# Altium PCB Universal_Driver.PcbDoc (part 1 of 2)
Units mm, origin at the board's own origin, x right, y up, seen from the top; angles counter-clockwise.
Board outline 105.6 x 112.5 mm, 2 copper layers (Top Layer, Bottom Layer); 139 components, 137 nets, 533 pads, 143 vias.
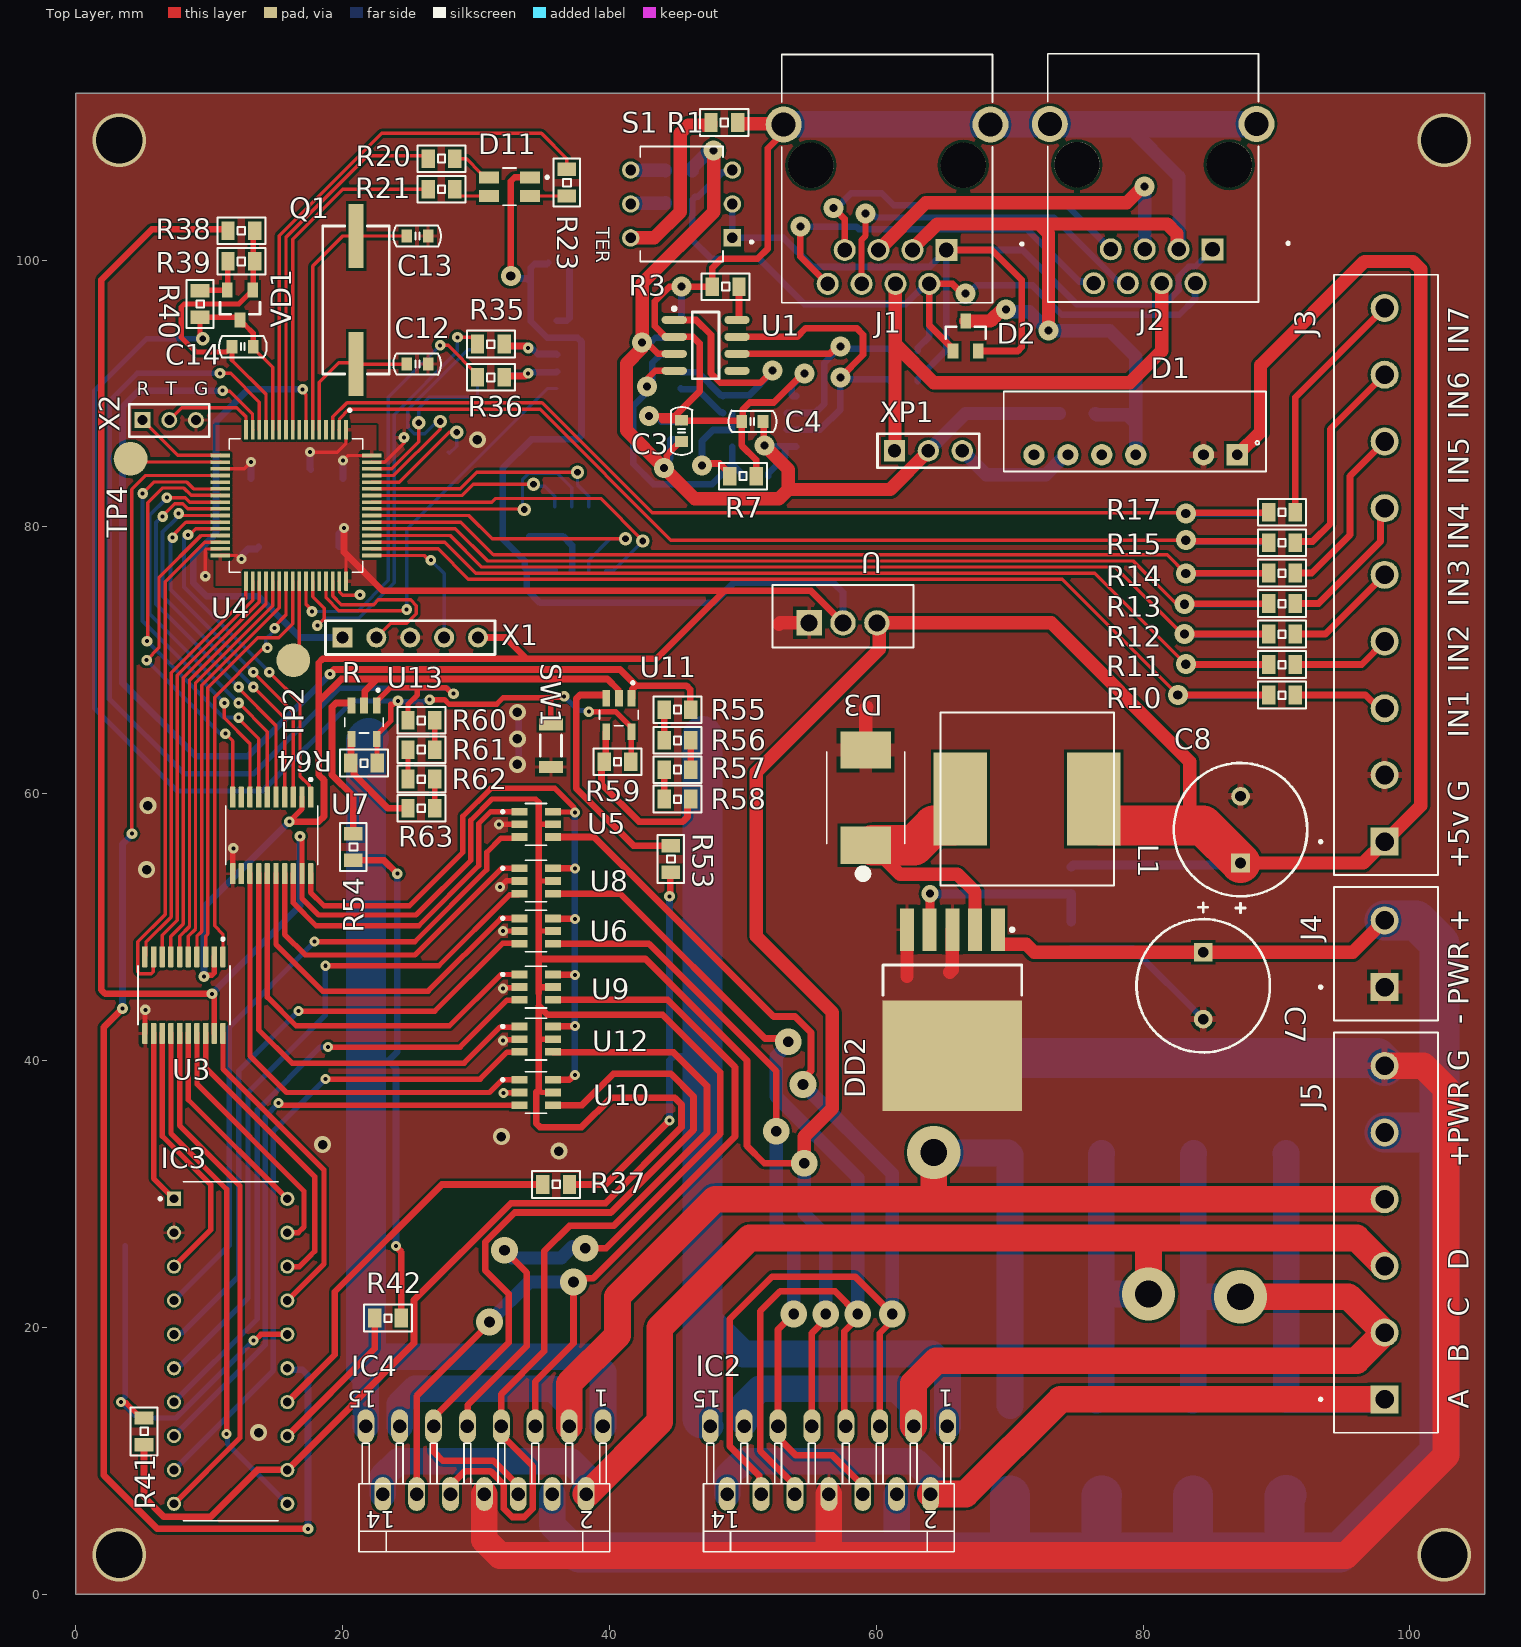
[diagram p0: Top Layer view]
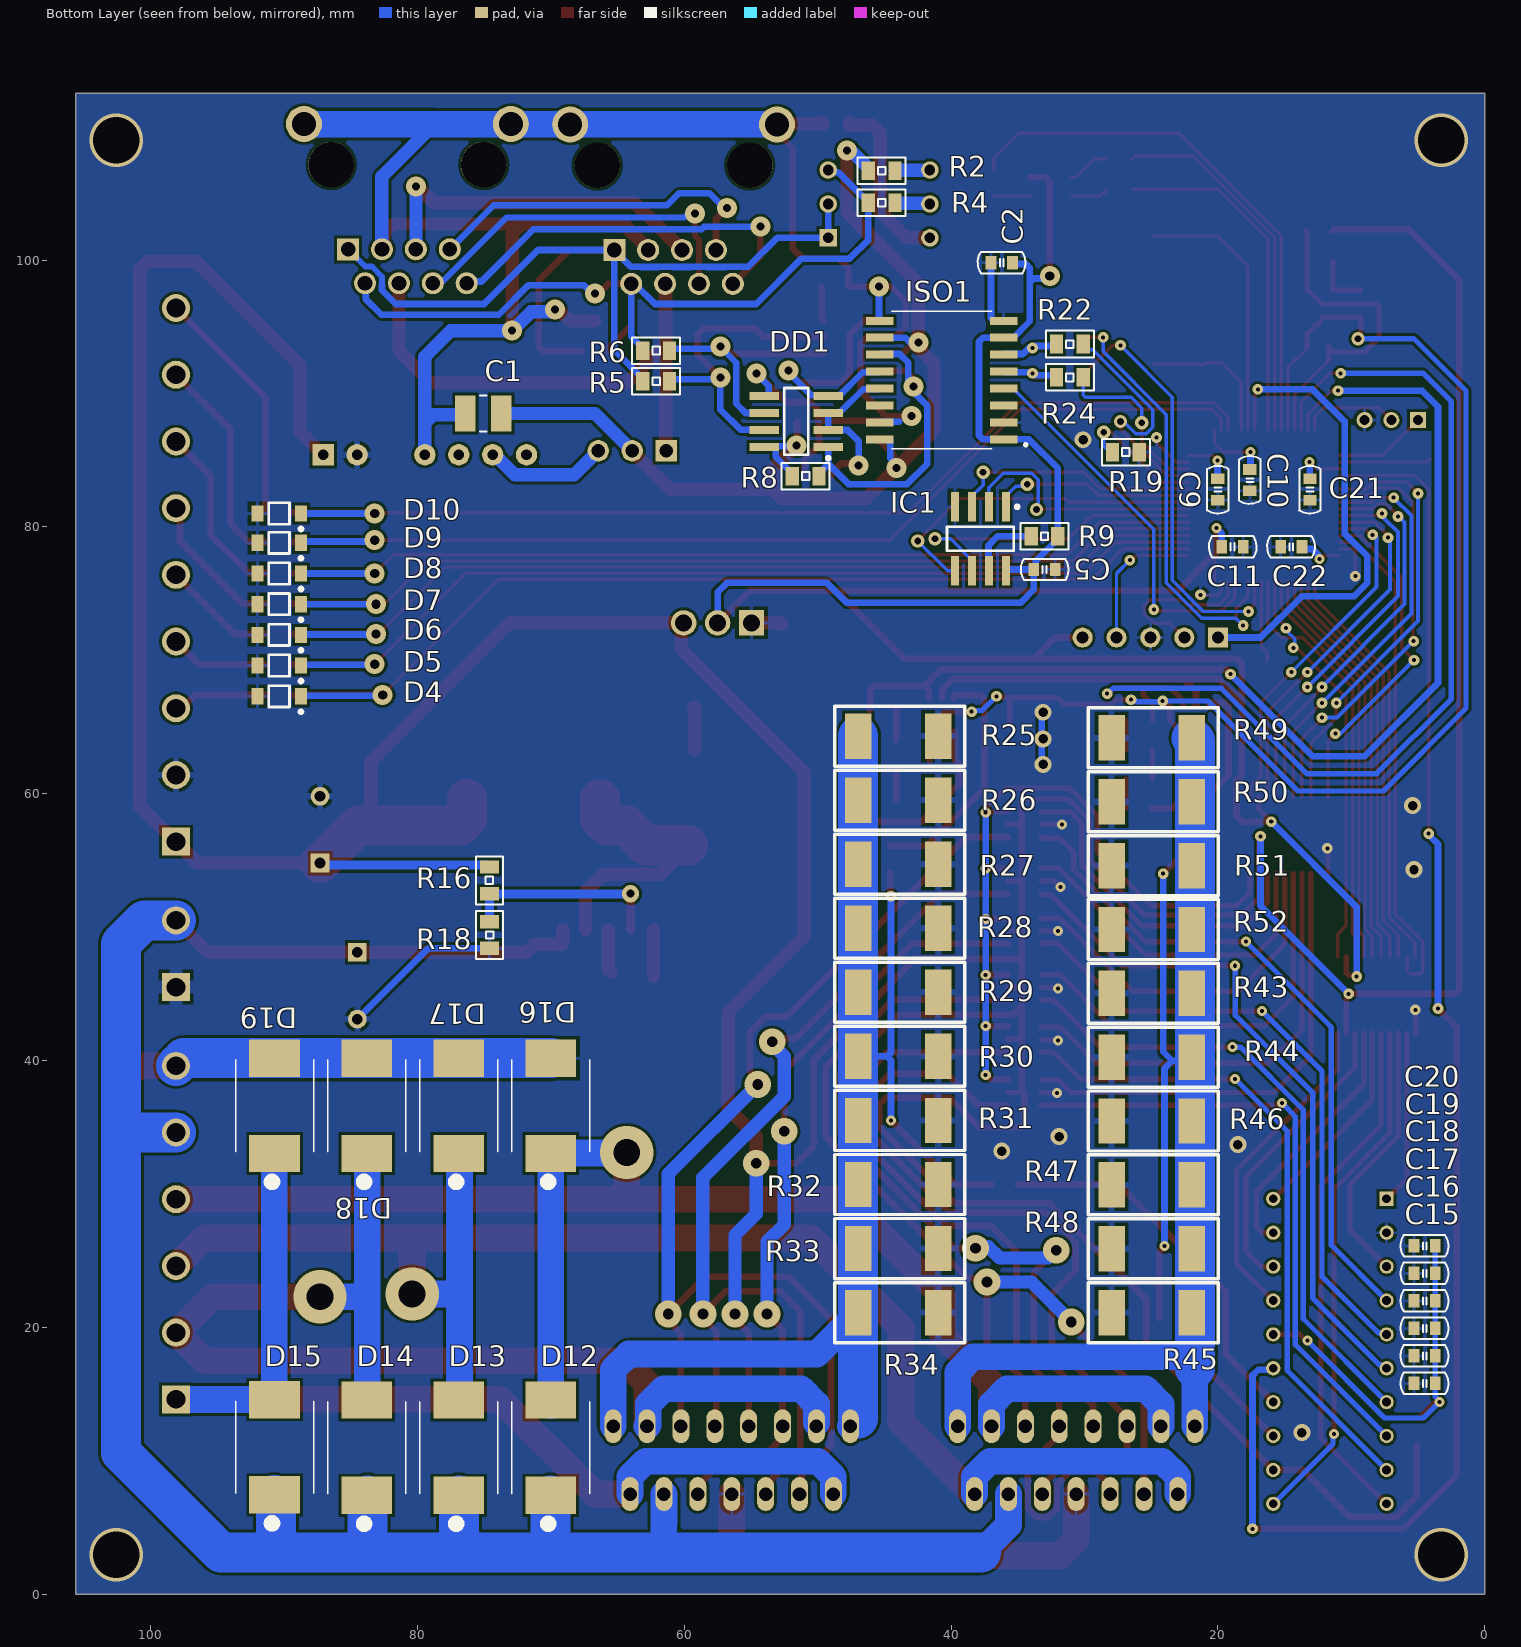
[diagram p1: Bottom Layer view, seen from below]

## Layer stack, top to bottom
Top Solder: solder mask 0.0102, Solder Resist, Dk 3.5
Top Layer: signal copper 0.0356
Dielectric 1: dielectric 0.32, FR-4, Dk 4.8
Bottom Layer: signal copper 0.0356
Bottom Solder: solder mask 0.0102, Solder Resist, Dk 3.5

## Board outline
0,0 0,112.5 105.6,112.5 105.6,0

## Design rules (kind name [scope] priority, off if disabled: settings)
Clearance [All] p1: gap=0.2 ignorepadtopadclearanceinfootprint=FALSE
PolygonConnect [All] p1: connectstyle=Relief reliefconductorwidth=0.254 reliefentries=4 polygonreliefangle="90 Angle" airgapwidth=0.254
RoutingVias [All] p1: holewidth=0.3 width=1 viastyle="Through Hole" minholewidth=0.3 minwidth=0 maxholewidth=1 maxwidth=4
SolderMaskExpansion [All] p1: expansion=0.102 istentingtop=FALSE
UnRoutedNet [All] p1: checkbadconnections=TRUE
Width [All] p1: maxlimit=4 minlimit=0.254 preferedwidth=0.254
29 further rules are at their usual default settings.

## Components (designator, comment, footprint, x,y, rotation, side; value= is the part's Value field where it differs from the comment)
C1 "10uF" CAPC3225X270N 75.059,88.5 r180 bottom
C2 "0.1uF" "CAPACITOR 0603" 35.4,99.8 r0 bottom
C3 "0.1uF" "CAPACITOR 0603" 45.4,88 r270 top
C4 "0.1uF" "CAPACITOR 0603" 49.9,87.9 r0 top
C5 "0.1uF" "CAPACITOR 0603" 33.8,76.8 r180 bottom
C7 "220uF 50v" "ECR 10x13mm" 84.5,45.6 r270 top value=220uF
C8 "220uF 50v" "ECR 10x13mm" 87.3,57.3 r90 top value=220uF
C9 "0.1uF" "CAPACITOR 0603" 20,83.6 r270 bottom
C10 "0.1uF" "CAPACITOR 0603" 17.6,82.7 r90 bottom
C11 "0.1uF" "CAPACITOR 0603" 19.7,78.5 r180 bottom
C12 "20pF" "CAPACITOR 0603" 26.4,92.2 r180 top
C13 "20pF" "CAPACITOR 0603" 26.4,101.8 r180 top
C14 "0.001uF" "CAPACITOR 0603" 11.7,93.5 r0 top
C15 "0.01uF" "CAPACITOR 0603" 3.7,15.8 r0 bottom
C16 "0.01uF" "CAPACITOR 0603" 3.7,17.86 r0 bottom
C17 "0.01uF" "CAPACITOR 0603" 3.7,19.92 r0 bottom
C18 "0.1uF" "CAPACITOR 0603" 3.7,21.98 r0 bottom
C19 "0.1uF" "CAPACITOR 0603" 3.7,24.04 r0 bottom
C20 "0.1uF" "CAPACITOR 0603" 3.7,26.1 r0 bottom
C21 "0.1uF" "CAPACITOR 0603" 13.1,83.6 r270 bottom
C22 "0.1uF" "CAPACITOR 0603" 13.7,78.5 r0 bottom
D1 "AM1DS-0505SJZ" AM2D-NZ 87.06,85.4 r180 top
D2 "SM712" SOT23 66.7,94.3 r90 top
D3 "MBRS540T3G" DIOM7958X213N 59.2,59.7 r90 top
D4 "MMSZ5226BT1G" ONSC-SOD-123-2-425-04_V 90.365,67.3 r0 bottom
D5 "MMSZ5226BT1G" ONSC-SOD-123-2-425-04_V 90.365,69.6 r0 bottom
D6 "MMSZ5226BT1G" ONSC-SOD-123-2-425-04_V 90.365,71.9 r0 bottom
D7 "MMSZ5226BT1G" ONSC-SOD-123-2-425-04_V 90.365,74.2 r0 bottom
D8 "MMSZ5226BT1G" ONSC-SOD-123-2-425-04_V 90.365,76.5 r0 bottom
D9 "MMSZ5226BT1G" ONSC-SOD-123-2-425-04_V 90.365,78.8 r0 bottom
D10 "MMSZ5226BT1G" ONSC-SOD-123-2-425-04_V 90.365,81 r0 bottom
D11 "150141M173100" LED_150141M173100 32.5,105.5 r0 top
D12 "MBRS540T3G" DIOM7958X213N 70,10.975 r90 bottom
D13 "MBRS540T3G" DIOM7958X213N 76.9,10.975 r90 bottom
D14 "MBRS540T3G" DIOM7958X213N 83.8,10.975 r90 bottom
D15 "MBRS540T3G" DIOM7958X213N 90.7,11.007 r90 bottom
D16 "MBRS540T3G" DIOM7958X213N 70,36.6 r90 bottom
D17 "MBRS540T3G" DIOM7958X213N 76.9,36.6 r90 bottom
D18 "MBRS540T3G" DIOM7958X213N 83.8,36.6 r90 bottom
D19 "MBRS540T3G" DIOM7958X213N 90.7,36.6 r90 bottom
DD1 "MAX485" NSO8 51.6,87.9 r0 bottom
DD2 "LM2596S-ADJ" TO-263 65.7,43.8 r270 top
IC1 "GD25Q16CTIGR" NSO8 37.8,79.1 r270 bottom
IC2 "" MW-15 56.44,7.5 r180 top
IC3 "L297" DIP850W45P254L2540H393Q20 11.6,18.2 r0 top
IC4 "" MW-15 30.62,7.5 r180 top
ISO1 "D?" *SOIC127P1030X265-16N 40.7,91 r0 bottom
J1 "A-2004-2-4-LPS-N-R" ASSMANN_A-2004-2-4-LPS-N-R 60.8,107.1 r180 top
J2 "A-2004-2-4-LPS-N-R" ASSMANN_A-2004-2-4-LPS-N-R 80.75,107.15 r180 top
J3 "TB003-500-P09BE" *CUI_TB003-500-P09BE 98.1,56.4 r90 top
J4 "TB003-500-P02BE" CUI_TB003-500-P02BE 98.1,45.5 r90 top
J5 "TB003-500-P06BE" CUI_TB003-500-P06BE 98.1,14.6 r90 top
L1 "33uH" SRR1208 71.3,59.6 r0 top
Q1 "12MHz" HC49SM 21,97 r270 top
R1 "560" "Resistor 0805" 47.6,110.3 r0 top
R2 "560" "Resistor 0805" 44.2,106.7 r0 bottom
R3 "10K" "Resistor 0805" 47.7,98 r0 top
R4 "120" "Resistor 0805" 44.2,104.3 r0 bottom
R5 "10" "Resistor 0805" 63.1,90.9 r180 bottom
R6 "10" "Resistor 0805" 63.1,93.2 r180 bottom
R7 "10K" "Resistor 0805" 49,83.8 r0 top
R8 "10K" "Resistor 0805" 51.9,83.8 r180 bottom
R9 "10K" "Resistor 0805" 32,79.3 r0 bottom
R10 "20" "Resistor 0805" 91.4,67.4 r180 top
R11 "20" "Resistor 0805" 91.4,69.683 r180 top
R12 "20" "Resistor 0805" 91.4,71.967 r180 top
R13 "20" "Resistor 0805" 91.4,74.25 r180 top
R14 "20" "Resistor 0805" 91.4,76.533 r180 top
R15 "20" "Resistor 0805" 91.4,78.817 r180 top
R16 "3K" "Resistor 0805" 74.6,52.5 r90 bottom
R17 "20" "Resistor 0805" 91.4,81.1 r180 top
R18 "1K" "Resistor 0805" 74.6,50.4 r270 bottom
R19 "510" "Resistor 0805" 27.9,85.6 r180 bottom
R20 "4.7k" "Resistor 0805" 26.4,107.6 r0 top
R21 "4.7k" "Resistor 0805" 26.4,105.3 r0 top
R22 "0" "Resistor 0805" 30.1,93.7 r0 bottom
R23 "4.7k" "Resistor 0805" 36.8,106.8 r270 top
R24 "0" "Resistor 0805" 30.1,91.2 r0 bottom
R25 "1R" R2512 43.964,64.314 r180 bottom
R26 "1R" R2512 43.964,59.512 r180 bottom
R27 "1R" R2512 43.964,54.711 r180 bottom
R28 "1R" R2512 43.964,49.909 r180 bottom
R29 "1R" R2512 43.964,45.108 r180 bottom
R30 "1R" R2512 43.964,40.306 r180 bottom
R31 "1R" R2512 43.964,35.505 r180 bottom
R32 "1R" R2512 43.964,30.703 r180 bottom
R33 "1R" R2512 43.964,25.902 r180 bottom
R34 "1R" R2512 43.964,21.1 r180 bottom
R35 "0" "Resistor 0805" 32.1,93.7 r180 top
R36 "0" "Resistor 0805" 32.1,91.2 r180 top
R37 "1K" "Resistor 0805" 35,30.7 r0 top
R38 "20" "Resistor 0805" 13.4,102.2 r180 top
R39 "620" "Resistor 0805" 13.4,99.9 r180 top
R40 "3.1k" "Resistor 0805" 9.3,97.7 r270 top
R41 "22K" "Resistor 0805" 5.1,13.2 r270 top
R42 "1K" "Resistor 0805" 24.4,20.7 r180 top
R43 "1R" R2512 24.964,45.034 r180 bottom
R44 "1R" R2512 24.964,40.248 r180 bottom
R45 "1R" R2512 24.964,21.1 r180 bottom
R46 "1R" R2512 24.964,35.461 r180 bottom locked
R47 "1R" R2512 24.964,30.674 r180 bottom
R48 "1R" R2512 24.964,25.887 r180 bottom
R49 "1R" R2512 24.964,64.182 r180 bottom
R50 "1R" R2512 24.964,59.395 r180 bottom
R51 "1R" R2512 24.964,54.608 r180 bottom
R52 "1R" R2512 24.964,49.821 r180 bottom
R53 "1K" "Resistor 0805" 44.6,56.1 r270 top
R54 "1K" "Resistor 0805" 20.8,57 r270 top
R55 "10K" "Resistor 0805" 44.1,66.3 r0 top
R56 "10K" "Resistor 0805" 46.1,64 r180 top
R57 "10K" "Resistor 0805" 44.1,61.8 r0 top
R58 "10K" "Resistor 0805" 46.1,59.6 r180 top
R59 "10K" "Resistor 0805" 41.6,62.4 r180 top
R60 "10K" "Resistor 0805" 26.9,65.5 r180 top
R61 "10K" "Resistor 0805" 24.9,63.3 r0 top
R62 "10K" "Resistor 0805" 26.9,61.1 r180 top
R63 "10K" "Resistor 0805" 24.9,58.9 r0 top
R64 "10K" "Resistor 0805" 22.6,62.3 r180 top
S1 "DS04-254-1L-03BK" SW_DS04-254-1L-03BK 45.4,104.2 r180 top
SW1 "" "R - 1206" 35.6,63.6 r90 top
TP2 "" TestPoint_SMD 16.3,70 r0 top
TP4 "" TestPoint_SMD 4.1,85.1 r0 top
U "LM1117T-3.3" TO254P470X1016X2222-3P 60.04,73.816 r0 top
U1 "MCP2551-I/SN" SOIC-SN8_L 47.2,93.6 r0 top
U3 "TXS0108EPWR" SOP65P640X120-20N 8.1,44.9 r270 top
U4 "STM32F303RET6" QFP50P1200X1200X160-64N 16.5,81.6 r270 top
U5 "TS5A3160DBVR" *SOT95P280X145-6N 34.5,57.7 r0 top
U6 "TS5A3160DBVR" *SOT95P280X145-6N 34.5,49.7 r0 top
U7 "TXS0108EPWR" SOP65P640X120-20N 14.675,56.87 r270 top
U8 "TS5A3160DBVR" *SOT95P280X145-6N 34.5,53.45 r0 top
U9 "TS5A3160DBVR" *SOT95P280X145-6N 34.5,45.5 r0 top
U10 "TS5A3160DBVR" *SOT95P280X145-6N 34.5,37.6 r0 top
U11 "LMC7101BIM5" *SOT95P280X145-5N 40.7,65.9 r270 top
U12 "TS5A3160DBVR" *SOT95P280X145-6N 34.5,41.6 r0 top
U13 "LMC7101BIM5" *SOT95P280X145-5N 21.6,65.345 r270 top
VD1 "TL431" SOT23 12.307,96.624 r270 top
X1 "PLS-5" PLS-5-3D 19.98,71.7 r0 top
X2 "PLS2-3" PLS-3-2 5,88 r270 top
XP1 "PLS-3" ZL201-3 63.9,85.7 r0 top

## Footprints (in the part's own frame and the unit in brackets; to place one, negate y for a bottom-side part, rotate by r counter-clockwise, add the part's x,y. Pads: shape width x height; smd on the part's side, far side on the other; paste and mask are expansions set on the pad)
*CUI_TB003-500-P09BE [mm]
  rect 2.1x2.1 hole 1.4: 1(0,0)
  round 2.1 hole 1.4: 2(5,0) 3(10,0) 4(15,0) 5(20,0) 6(25,0) 7(30,0) 8(35,0) 9(40,0)
  silkscreen extent -2.5,-4 42.5,4.9
*SOIC127P1030X265-16N [mm]
  rect 2.06x0.6 smd: 1(-4.64,4.445) 2(-4.64,3.175) 3(-4.64,1.905) 4(-4.64,0.635) 5(-4.64,-0.635) 6(-4.64,-1.905) 7(-4.64,-3.175) 8(-4.64,-4.445) 9(4.64,-4.445) 10(4.64,-3.175) 11(4.64,-1.905) 12(4.64,-0.635) 13(4.64,0.635) 14(4.64,1.905) 15(4.64,3.175) 16(4.64,4.445)
  silkscreen extent -6.4,-5.15 3.75,5.15
*SOT95P280X145-5N [mm]
  rect 1.21x0.59 smd: 1(-1.255,0.95) 2(-1.255,0) 3(-1.255,-0.95) 4(1.255,-0.95) 5(1.255,0.95)
  silkscreen extent -2.51,-1.45 0.8,1.45, body extent -1.18,-1.45 1.2,1.45, height 1.1
*SOT95P280X145-6N [mm]
  rect 1.21x0.58 smd: 1(-1.255,0.95) 2(-1.255,0) 3(-1.255,-0.95) 4(1.255,-0.95) 5(1.255,0) 6(1.255,0.95)
  silkscreen extent -2.6,-1.56 0.8,1.56
AM2D-NZ [mm]
  rect 1.6x1.6 hole 0.8: 1(0,0)
  round 1.6 hole 0.8: 2(2.54,0) 4(7.62,0) 5(10.16,0) 6(12.7,0) 7(15.24,0)
  silkscreen extent -2.15,-4.75 17.5,1.25
ASSMANN_A-2004-2-4-LPS-N-R [mm]
  rect 1.65x1.65 hole 1.1: 1(-4.445,6.35)
  round 1.65 hole 1.1: 2(-3.175,8.89) 3(-1.905,6.35) 4(-0.635,8.89) 5(0.635,6.35) 6(1.905,8.89) 7(3.175,6.35) 8(4.445,8.89)
  round 2.7 hole 1.8: S1(-7.75,-3.05) S2(7.75,-3.05)
  round 3.4 hole 3.4 unplated: ""(-5.715,0) ""(5.715,0)
  silkscreen extent -10.21,-8.3 7.9,10.3
"CAPACITOR 0603" [mm]
  rect 0.8x1 smd: 1(0,0) 2(1.6,0)
  silkscreen extent -0.97,-0.8 2.6,0.8, body extent -0.01,-0.38 1.64,0.42, height 0.81
CAPC3225X270N [mm]
  rect 1.53x2.72 smd: 1(-1.341,0) 2(1.341,0)
  silkscreen extent -0.26,-1.35 0.26,1.35
CUI_TB003-500-P02BE [mm]
  rect 2.1x2.1 hole 1.4: 1(0,0)
  round 2.1 hole 1.4: 2(5,0)
  silkscreen extent -2.5,-4 7.5,4.9
CUI_TB003-500-P06BE [mm]
  rect 2.1x2.1 hole 1.4: 1(0,0)
  round 2.1 hole 1.4: 2(5,0) 3(10,0) 4(15,0) 5(20,0) 6(25,0)
  silkscreen extent -2.5,-4 27.5,4.9
DIOM7958X213N [mil]
  rect 110x150 smd: A(140.49,0) C(-140.49,0)
  silkscreen extent -237,-115 135,115
DIP850W45P254L2540H393Q20 [mm]
  rect 1.06x1.06 hole 0.66: 1(-4.25,11.43)
  round 1.06 hole 0.66: 2(-4.25,8.89) 3(-4.25,6.35) 4(-4.25,3.81) 5(-4.25,1.27) 6(-4.25,-1.27) 7(-4.25,-3.81) 8(-4.25,-6.35) 9(-4.25,-8.89) 10(-4.25,-11.43) 11(4.25,-11.43) 12(4.25,-8.89) 13(4.25,-6.35) 14(4.25,-3.81) 15(4.25,-1.27) 16(4.25,1.27) 17(4.25,3.81) 18(4.25,6.35) 19(4.25,8.89) 20(4.25,11.43)
  silkscreen extent -5.38,-12.7 3.55,12.7
"ECR 10x13mm" [mm] "Rad Capacitor 50В-220мкФ"
  rect 1.4x1.4 hole 0.8 mask+0.06: 1(-2.5,0)
  round 1.4 hole 0.8 mask+0.06: 2(2.5,0)
  silkscreen extent -6.22,-5 5,5, body extent -5,-5 4.97,5, height 12.51
HC49SM [mm] "Quartz crystal resonator"
  rect 4.8x1.1 smd mask+0.06: 1(-4.8,0) 2(4.8,0)
  silkscreen extent -5.55,-2.5 5.55,2.5, body extent -6.7,-2.45 6.7,2.45, height 5.09
LED_150141M173100 [mm]
  rect 1.5x0.9 smd: 1(1.55,0.7) 2(1.55,-0.7) 3(-1.55,0.7) 4(-1.55,-0.7)
  silkscreen extent -0.5,-1.4 2.93,1.4
MW-15 [mil]
  oval 50x100 hole 40: 1(-350,-200) 2(-300,0) 3(-250,-200) 4(-200,0) 5(-150,-200) 6(-100,0) 7(-50,-200) 8(0,0) 9(50,-200) 10(100,0) 11(150,-200) 12(200,0) 13(250,-200) 14(300,0) 15(350,-200)
  silkscreen extent -370,-150 370,170
NSO8 [mm] "SOIC, 8-Leads, Body 4.9x3.9mm, Pitch 1.27mm"
  rect 2.2x0.6 smd mask+0.06: 1(-2.4,1.905) 2(-2.4,0.635) 3(-2.4,-0.635) 4(-2.4,-1.905) 5(2.4,-1.905) 6(2.4,-0.635) 7(2.4,0.635) 8(2.4,1.905)
  silkscreen extent -2.52,-2.5 0.9,2.88, body extent -3,-2.45 3,2.45, height 1.7
ONSC-SOD-123-2-425-04_V [mm] "SOD, 2-Leads, Body 2.69x1.6mm"
  rect 0.91x1.22 smd: 1(-1.635,0) 2(1.635,0)
  silkscreen extent -1.76,-0.8 0.78,1.28, body extent -1.35,-0.8 1.35,0.8, height 1.35
PLS-3-2 [mm] "Connector; Header; 1x3 Position"
  rect 1.2x1.2 hole 0.75: 1(0,0)
  round 1.2 hole 0.75: 2(0,2) 3(0,4)
  silkscreen extent -1.2,-1 1.25,5, body extent -1.2,-1 1.2,5, height 5.5
PLS-5-3D [mm] "Connector; Header; 5 Position"
  rect 1.5x1.5 hole 0.9: 1(0,0)
  round 1.5 hole 0.9: 2(2.54,0) 3(5.08,0) 4(7.62,0) 5(10.16,0)
  silkscreen extent -1.27,-1.27 11.43,1.27, body extent -1.27,-1.27 11.43,1.27, height 8.44
QFP50P1200X1200X160-64N [mm]
  rrect25% 1.47x0.28 smd: 1(-5.67,3.75) 2(-5.67,3.25) 3(-5.67,2.75) 4(-5.67,2.25) 5(-5.67,1.75) 6(-5.67,1.25) 7(-5.67,0.75) 8(-5.67,0.25) 9(-5.67,-0.25) 10(-5.67,-0.75) 11(-5.67,-1.25) 12(-5.67,-1.75) 13(-5.67,-2.25) 14(-5.67,-2.75) 15(-5.67,-3.25) 16(-5.67,-3.75) 33(5.67,-3.75) 34(5.67,-3.25) 35(5.67,-2.75) 36(5.67,-2.25) 37(5.67,-1.75) 38(5.67,-1.25) 39(5.67,-0.75) 40(5.67,-0.25) 41(5.67,0.25) 42(5.67,0.75) 43(5.67,1.25) 44(5.67,1.75) 45(5.67,2.25) 46(5.67,2.75) 47(5.67,3.25) 48(5.67,3.75)
  rrect25% 0.28x1.47 smd: 17(-3.75,-5.67) 18(-3.25,-5.67) 19(-2.75,-5.67) 20(-2.25,-5.67) 21(-1.75,-5.67) 22(-1.25,-5.67) 23(-0.75,-5.67) 24(-0.25,-5.67) 25(0.25,-5.67) 26(0.75,-5.67) 27(1.25,-5.67) 28(1.75,-5.67) 29(2.25,-5.67) 30(2.75,-5.67) 31(3.25,-5.67) 32(3.75,-5.67) 49(3.75,5.67) 50(3.25,5.67) 51(2.75,5.67) 52(2.25,5.67) 53(1.75,5.67) 54(1.25,5.67) 55(0.75,5.67) 56(0.25,5.67) 57(-0.25,5.67) 58(-0.75,5.67) 59(-1.25,5.67) 60(-1.75,5.67) 61(-2.25,5.67) 62(-2.75,5.67) 63(-3.25,5.67) 64(-3.75,5.67)
  silkscreen extent -7.24,-5 5,5, body extent -6,-6 6,6, height 1.59
R2512 [mm]
  rect 2x3.4 smd: 1(-3,0) 2(3,0)
  silkscreen extent -4.75,-2.25 5,2.25, body extent -3.2,-1.6 3.2,1.6, height 0.6
"R - 1206" [mm] "Резистор 1206"
  rect 0.9x1.8 smd: 1(-1.6,0) 2(1.6,0)
  silkscreen extent -0.8,-0.8 0.8,0.8, body extent -1.6,-0.8 1.6,0.8, height 0.6
"Resistor 0805" [mm]
  rect 1x1.4 smd: 1(0,0) 2(2,0)
  silkscreen extent -0.8,-1 2.8,1, body extent -0.03,-0.65 2.02,0.65, height 0.41
SOIC-SN8_L [mm] "SOIC, 8-Leads, Body 4.9x3.8mm, Pitch 1.27mm, IPC High Density"
  oval 1.9x0.6 smd: 1(-2.35,1.905) 2(-2.35,0.635) 3(-2.35,-0.635) 4(-2.35,-1.905) 5(2.35,-1.905) 6(2.35,-0.635) 7(2.35,0.635) 8(2.35,1.905)
  silkscreen extent -2.47,-2.5 1,2.88, body extent -2,-2.5 2,2.5, height 1.75
SOP65P640X120-20N [mm]
  rrect25% 1.57x0.41 smd: 1(-2.87,2.925) 2(-2.87,2.275) 3(-2.87,1.625) 4(-2.87,0.975) 5(-2.87,0.325) 6(-2.87,-0.325) 7(-2.87,-0.975) 8(-2.87,-1.625) 9(-2.87,-2.275) 10(-2.87,-2.925) 11(2.87,-2.925) 12(2.87,-2.275) 13(2.87,-1.625) 14(2.87,-0.975) 15(2.87,-0.325) 16(2.87,0.325) 17(2.87,0.975) 18(2.87,1.625) 19(2.87,2.275) 20(2.87,2.925)
  silkscreen extent -4.29,-3.45 2.2,3.45, body extent -3.16,-3.25 3.24,3.25, height 1.2
SOT23 [mm] "SOT23, 3-Leads, Body 2.9x1.3mm, Pitch 0.95mm"
  rect 1.1x0.8 smd mask+0.06: 1(-1.125,0.95) 2(-1.125,-0.95) 3(1.125,0)
  silkscreen extent -0.2,-1.5 0.7,1.5, body extent -1.32,-1.5 1.32,1.5, height 1.08
SRR1208 [mm]
  rect 4x7 smd: 1(-5,0) 2(5,0)
  silkscreen extent -6.5,-6.5 6.5,6.5
SW_DS04-254-1L-03BK [mm]
  rect 1.308x1.308 hole 0.8: 1A(-3.81,2.54)
  round 1.308 hole 0.8: 1B(3.81,2.54) 2A(-3.81,0) 2B(3.81,0) 3A(-3.81,-2.54) 3B(3.81,-2.54)
  silkscreen extent -5.35,-4.31 3.1,4.31
TestPoint_SMD [mm]
  round 2.524 smd: 1(0,0)
TO254P470X1016X2222-3P [mil]
  rect 75x75 hole 50: 1(-200,-40)
  round 75 hole 50: 2(-100,-40) 3(0,-40)
  silkscreen extent -308,-112 108,72
TO-263 [mm] "D2-PAK, 6-Leads, Body 8.6x10.2mm, Pitch 1.7mm, Lead Span 14.1mm"
  rect 3.2x1.05 smd mask+0.06: 1(-6,3.4) 2(-6,1.7) 3(-6,0) 4(-6,-1.7) 5(-6,-3.4)
  rect 8.3x10.45 smd mask+0.06: 6(3.45,0)
  silkscreen extent -6.12,-5.2 -1.1,5.2, body extent -7.18,-5.08 7.46,5.08, height 4.57
ZL201-3 [mm] "Connector; PLS-3; pitch 2.54"
  rect 1.6x1.6 hole 1 mask+0.06: 1(-2.54,0)
  round 1.6 hole 1 mask+0.06: 2(0,0) 3(2.54,0)
  silkscreen extent -3.81,-1.27 3.81,1.27, body extent -3.81,-1.27 3.81,1.27, height 8.44

## Part data
C1 C2 C3 C4 C5 C9 C10 C11 C12 C13 C14 C15 C16 C17 C18 C19 C20 C21 C22: library part Capasitor
C7 C8: library part "Cap Pol", "Polarized Capacitor (Rad)", Voltage=50, Type=Type, URL=http://www.hitano.com.tw/PDF/ECR_081225.pdf
D2: "Asymmetrical TVS Diode for Extended Common-Mode RS-485"
D3 D12 D13 D14 D15 D16 D17 D18 D19: "Diode Schottky 40V 5A Surface Mount SMC", Package="DO-214 ON Semiconductor", Availability=Unavailable, MF="ON Semiconductor", MP=MBRS540T3G, Price=None, SnapEDA_Link=https://www.snapeda.com/parts/MBRS540T3G/ON%20Semiconductor/view-part/78777/?ref=snap
D4 D5 D6 D7 D8 D9 D10: "Zener Voltage Regulator, 500 mW, 2-Pin SOD-123, Pb-Free, Tape and Reel", Manufacturer="On Semiconductor", Supplier Part Number 1=MMSZ5226BT1GOSTR-ND, ComponentLink1Description="Manufacturer URL", ComponentLink1URL=http://www.onsemi.com/, ComponentLink2Description=Datasheet, ComponentLink2URL=http://www.onsemi.com/pub_link/Collateral/MMSZ5221BT1-D.PDF, ComponentLink3Description="Package Specification", ComponentLink3URL=http://www.onsemi.com/pub_link/Collateral/425-04.PDF, DatasheetVersion="Rev. 12", Mounting Technology="Surface Mount", P Max (W)=0.5, PackageDescription="2-Pin SOD, Body 1.6 x 2.69 mm", PackageReference=SOD-123-2-425-04, PackageVersion="Rev. G, 10/2009", Packing="Tape and Reel", PartNumber=MMSZ5226BT1G, RoHS=Pb-Free, Supplier 1=Digi-Key, Supplier 2=Digi-Key, Supplier 3=Digi-Key, Supplier 4=Farnell, Supplier 5=Farnell, Supplier 6=Farnell, Supplier 7=Newark, Supplier 8=Newark, Supplier 9=Mouser, Supplier Part Number 2=MMSZ5226BT1GOSCT-ND, Supplier Part Number 3=MMSZ5226BT1GOSDKR-ND, Supplier Part Number 4=1431269, Supplier Part Number 5=1431269RL, Supplier Part Number 6=2370825, Supplier Part Number 7=67R1367, Supplier Part Number 8=45J1591, Supplier Part Number 9=863-MMSZ5226BT1G, VZ Typ (V)=3.3
D11: "Red, Green, Blue _RGB_ 625nm Red, 520nm Green, 470nm Blue LED Indication - Discrete 2V Red, 3.2V Green, 3.2V Blue 1411 _3528 Metric_", Package="1411 WÃ¼rth Elektronik", Availability=Unavailable, MF="Wurth Electronics", MP=150141M173100, Price=None, SnapEDA_Link=https://www.snapeda.com/parts/150141M173100/Wurth%20Electronics%20Inc./view-part/281733/?ref=snap
DD1: "Low-Power, Slew-Rate-Limited RS-485/RS-422 Transceiver", ComponentLink1URL=http://pdfserv.maxim-ic.com/en/ds/MAX1487-MAX491.pdf, Type=MAX485
DD2: "SIMPLE SWITCHER® Power Converter 150 KHz 3A Step-Down Voltage Regulator, 5-pin TO-263", Manufacturer="National Semiconductor", ComponentLink1URL=http://www.national.com/ds/LM/LM2596.pdf, ComponentLink2URL=http://www.national.com/pf/LM/LM2596.html, ComponentLink3URL=http://www.national.com/packaging/folders/ts5b.html, CompType=Switcher, PartNumber=LM2596S-ADJ, Published=13.04.2012, Publisher="Reukov A.V."
IC1: library part W25Q128FVEIG, "128M-bit Serial Flash Memory with uniform 4KB sectors and Dual/Quad SPI and QPI"
IC2 IC4: library part L298N, "Dual Full-Bridge Driver"
IC3: "Stepper Motor Controller"
ISO1: library part ISO7341
J1 J2: "Jack Modular Connector 8p8c _RJ45, Ethernet_ 90Â° Angle _Right_ Shielded", Package=None, Availability=Unavailable, MF="Assmann WSW", MP=A-2004-2-4-LPS-N-R, Price=None, SnapEDA_Link=https://www.snapeda.com/parts/A-2004-2-4-LPS-N-R/Assmann%20WSW%20Components/view-part/454861/?ref=snap
J3: "2~24 Poles, Screw Type, Horizontal, 5.0 Pitch, 26~14 (AWG), Terminal Block Connector", Package=None, Availability=Warning, Check_prices=https://www.snapeda.com/parts/TB003-500-P09BE/CUI%20Devices/view-part/3590672/?ref=eda, CUI_purchase_URL=https://www.cuidevices.com/product/interconnect/connectors/terminal-blocks/tb003-500-series?utm_source=snapeda.com&utm_medium=referral&utm_campaign=snapedaBOM, DigiKey-Purchase-URL=https://snapeda.com/shop?store=DigiKey&id=3590672, MF="CUI Devices", Mouser-Purchase-URL=https://snapeda.com/shop?store=Mouser&id=3590672, MP=TB003-500-P09BE, Price=None, SnapEDA_Link=https://www.snapeda.com/parts/TB003-500-P09BE/CUI%20Devices/view-part/3590672/?ref=snap
J4 J5: "2~24 Poles, Screw Type, Horizontal, 5.0 Pitch, 26~14 _AWG_, Terminal Block Connector", Package=None, Availability=Unavailable, MF="CUI Devices", Price=None
  J4: MP=TB003-500-P02BE, SnapEDA_Link=https://www.snapeda.com/parts/TB003-500-P02BE/CUI%20Devices/view-part/3590637/?ref=snap
  J5: MP=TB003-500-P06BE, SnapEDA_Link=https://www.snapeda.com/parts/TB003-500-P06BE/CUI%20Devices/view-part/3590657/?ref=snap
L1: library part "Inductor With Magnetic core", "Inductor With Core"
Q1: library part "Quartz Crystal", "Quartz Crystal"
R1 R2 R3 R4 R5 R6 R7 R8 R9 R10 R11 R12 R13 R14 R15 R16 R17 R18 R19 R20 R21 R22 R23 R24 R35 R36 R37 R38 R39 R40 R41 R42 R53 R54 R55 R56 R57 R58 R59 R60 R61 R62 R63 R64: library part Resistor
R25 R26 R27 R28 R29 R30 R31 R32 R33 R34 R43 R44 R45 R46 R47 R48 R49 R50 R51 R52: library part "Resistor - 1%", "Resistor - 1%"
S1: "3 Pole, Raised Actuator, Flat Bottom, Long Pin, DIP Switch", Package=None, Availability=Unavailable, MF="CUI Devices", MP=DS04-254-1L-03BK, Price=None, SnapEDA_Link=https://www.snapeda.com/parts/DS04-254-1L-03BK/CUI%20Devices/view-part/4467361/?ref=snap
SW1: library part "SMD Solder Jumper", "2 SMD Pads for Bound by Solder  Drop"
TP2 TP4: library part "Test Point", "Test Point"
U: "Linear Voltage Regulator IC 1 Output 800mA TO-220-3", Package="TO-220 Texas Instruments", Availability=Unavailable, MF="Texas Instruments", MP=LM1117T-3.3, Price=None, SnapEDA_Link=https://www.snapeda.com/parts/LM1117T-3.3/Texas%20Instruments/view-part/103788/?ref=snap
U1: "High-Speed CAN Transceiver, 8-Pin SOIC, Industrial Temperature", Supplier Part Number 1=MCP2551-I/SN-ND, Code_IPC=SOIC127P600-8, Code_JEDEC=MS-012, ComponentLink1Description=Datasheet, ComponentLink1URL=http://ww1.microchip.com/downloads/en/DeviceDoc/21667E.pdf, ComponentLink2Description="Packaging Specification", ComponentLink2URL=http://www.microchip.com/stellent/groups/techpub_sg/documents/packagingspec/en012702.pdf, ComponentLink3Description="Microchip.com Home", ComponentLink3URL=http://www.microchip.com/, DatasheetVersion="revE, Jan-2007", PackageDescription="8-Lead Plastic Small Outline (SN) - Narrow, 3.90mm Body [SOIC]", PackageReference=SOIC-SN8, PackageVersion="revBB, Aug-2009", Published=29-Jan-2009, Publisher="Altium Limited", Supplier 1=Digi-Key, Supplier 2=Farnell, Supplier Part Number 2=9758569
U3 U7: "8-Bit Bidirectional Voltage-Level Shifter For Open-Drain And Push-Pull Application", Package="TSSOP-20 Texas Instruments", Availability=Unavailable, DigiKey-Purchase-URL=https://snapeda.com/shop?store=DigiKey&id=105750, MF="Texas Instruments", Mouser-Purchase-URL=https://snapeda.com/shop?store=Mouser&id=105750, MP=TXS0108EPWR, Price=None, SnapEDA_Link=https://www.snapeda.com/parts/TXS0108EPWR/Texas%20Instruments/view-part/105750/?ref=snap, Texas_Instruments-Purchase-URL=https://snapeda.com/shop?store=Texas+Instruments&id=105750
U4: "ARMÂ® CortexÂ®-M4 STM32F3 Microcontroller IC 32-Bit 72MHz 512KB _512K x 8_ FLASH 64-LQFP _10x10_", Package="LQFP-64 STMicroelectronics", Availability=Unavailable, MF=STMicroelectronics, MP=STM32F303RET6, Price=None, SnapEDA_Link=https://www.snapeda.com/parts/STM32F303RET6/STMicroelectronics/view-part/226642/?ref=snap
U5 U6 U8 U9 U10 U12: "1-?, 5-V, 2:1 (SPDT), analog switch (6-pin SOT-23, SC70 packages) 6-SOT-23 -40 to 85", Package="SOT-23-6 Texas Instruments", Arrow_Electronics-Purchase-URL=https://snapeda.com/shop?store=Arrow+Electronics&id=332002, Availability=Good, Check_prices=https://www.snapeda.com/parts/TS5A3160DBVR/Texas%20Instruments/view-part/332002/?ref=eda, DigiKey-Purchase-URL=https://snapeda.com/shop?store=DigiKey&id=332002, MF="Texas Instruments", Mouser-Purchase-URL=https://snapeda.com/shop?store=Mouser&id=332002, MP=TS5A3160DBVR, Price=None, SnapEDA_Link=https://www.snapeda.com/parts/TS5A3160DBVR/Texas%20Instruments/view-part/332002/?ref=snap, Texas_Instruments-Purchase-URL=https://snapeda.com/shop?store=Texas+Instruments&id=332002
VD1: "Adjustable Precision Shunt Regulator", Nominal_voltage_V={Nominal_voltage_V}, Power_W={Power_W}, Body={Body}, Class="Электронные компоненты", Installation={Installation}, Ordering_Information={Ordering_Information}, Pins=3, Pitch_mm={Pitch_mm}, SubClass=Стабилитроны
X1: "Header, 5-Pin", LatestRevisionDate=17-Jul-2002, LatestRevisionNote="Re-released for DXP Platform.", Publisher="Altium Limited"
X2: "Header, 3-Pin", LatestRevisionDate=17-Jul-2002, LatestRevisionNote="Re-released for DXP Platform.", Publisher="Altium Limited"
XP1: library part "Select jump", "Connector, 3-Pin", Class="Электронные компоненты", Installation=DIP, Ordering_Information={Ordering_Information}, Pins=3, Pitch_mm={Pitch_mm}, SubClass=Разъемы, Type_of_connector={Type_of_connector}
U11 U13: Check_prices=https://www.snapeda.com/parts/LMC7101BIM5/Texas%20Instruments/view-part/19255/?ref=eda, SnapEDA_Link=https://www.snapeda.com/parts/LMC7101BIM5/Texas%20Instruments/view-part/19255/?ref=snap

## Via types
v1: diameter 0.8, hole 0.3, Top Layer to Bottom Layer, 49 vias
v2: diameter 0.75, hole 0.3, Top Layer to Bottom Layer, 28 vias
v3: diameter 1.5, hole 0.6, Top Layer to Bottom Layer, 19 vias
v4: diameter 2, hole 0.8, Top Layer to Bottom Layer, 12 vias
v5: diameter 1.27, hole 0.711, Top Layer to Bottom Layer, 10 vias
v6: diameter 1, hole 0.5, Top Layer to Bottom Layer, 9 vias
v7: diameter 1.5, hole 0.7, Top Layer to Bottom Layer, 8 vias
v8: diameter 4, hole 3.5, Top Layer to Bottom Layer, 4 vias
v9: diameter 4, hole 2, Top Layer to Bottom Layer, 3 vias
v10: diameter 1.3, hole 0.6, Top Layer to Bottom Layer, 1 vias

## Nets (pads, with @x,y where several pads share a name; then routed paths per layer and width w, separated by ;. In a path a pad name is that pad's centre, name@x,y a point inside that pad or via, vN(x,y) a via of type N, cw(c..) or ccw(c..) an arc to the next point about the centre after c; other vN are vias at no path point)
+3.3v: C2.1 C5.1 C9.1 C10.2 C11.1 C21.1 C22.1 D11.1 IC1.8 ISO1.1 ISO1.7 R9.1 U3.2 U4.1 U4.19 U4.32 U4.48 U4.64 U7.2 U11.2 U13.2 U.2 X1.5 | length 231.3
  Top Layer w0.254: U4.32@10.83,77.85 12.016,77.85 12.266,77.6 v2(12.4,77.6) ; U4.19@10.83,84.35 12.625,84.35 v2(13.125,84.85) ; v2(17.55,85.6) 19.6,85.6 20.25,86.25 U4.1@20.25,87.27 ; v2(20.025,84.975) 20.4,85.35 U4.64@22.17,85.35 ; U4.48@20.25,75.93 20.25,77.95
  Top Layer w0.4: v1(9.6,46.3) 9.677,46.377 10.177,46.377 10.375,46.575 U3.2@10.375,47.77 ; v1(16,57.9) 16.945,58.845 16.945,59.735 U7.2@16.95,59.74
  Top Layer w0.5: v1(16,57.9) 18.2,57.9 18.6,58.3 18.6,61.01 18.2,61.41 18.2,66.9 ; v2(20.1,79.9) 20.1,78.1 20.25,77.95 23,75.2 48.6,75.2 ; U13.2@21.6,66.6 21.645,66.645 21.645,67.664 22.581,68.6 ; X1.5@30.14,71.7 32.2,71.7 33.8,70.1 ; v7(32.6,98.8) 32.6,105.907 32.893,106.2 D11.1@34.05,106.2 ; U11.2@40.7,67.155 40.655,67.2 40.655,67.786 39.841,68.6 22.581,68.6 ; U.2@57.5,72.8 57.5,72.801 55.101,75.2 48.6,75.2 ; 18.2,66.9 18.2,69.807 18.493,70.1 33.8,70.1 ; 18.2,66.9 19.9,68.6 22.581,68.6 ; 33.8,70.1 43.5,70.1 48.6,75.2
  Bottom Layer w0.5: v1(9.6,46.3) 9.6,51.5 v1(16,57.9) ; v2(12.4,77.6) 12.448,77.648 12.448,77.88 12.904,78.336 13.55,78.336 13.7,78.486 C22.1@13.7,78.5 ; C21.1@13.1,83.6 13.125,83.625 v2(13.125,84.85) ; v2(17.55,85.6) 17.55,84.35 C10.2@17.6,84.3 ; C11.1@19.7,78.5 19.7,79.492 20.1,79.892 v2(20.1,79.9) ; C9.1@20,83.6 20.025,83.625 v2(20.025,84.975) ; v7(32.6,98.8) 32.791,98.609 33.791,98.609 34.1,98.3 ; C2.1@35.4,99.8 35.3,99.7 34.393,99.7 34.1,99.407 34.1,98.3 ; IC1.8@35.895,76.7 35.895,76.75 35.845,76.8 C5.1@33.8,76.8 ; U.2@57.5,72.8 57.5,75.1 56.8,75.8 49.3,75.8 47.8,74.3 34.8,74.3 33.8,75.3 C5.1@33.8,76.8 ; C5.1@33.8,76.8 33.65,76.95 33.65,77.45 32,79.1 R9.1@32,79.3 32,84.4 34.155,86.555 ISO1.1@36.06,86.555 37.607,86.555 37.9,86.848 37.9,93.882 37.607,94.175 ISO1.7@36.06,94.175 35.33,94.175 34.1,95.405 34.1,98.3
+5v: C8.1 D1.1 IC2.9 IC3.12 IC4.9 J3.1 L1.2 R16.2 R38.2 R41.2 U3.19 U5.5 U6.5 U7.19 U8.5 U9.5 U10.5 U12.5 U.3 | length 513.9
  Top Layer w0.4: U3.19@10.375,42.03 v1@10.375,44.717 ; v1@16.95,56.542 U7.19@16.95,54 16.95,52.15 18.2,50.9 25.5,50.9 29.6,55 29.6,58 31.2,59.6 34.466,59.6 34.7,59.366 ; 34.7,37.8 34.9,37.6 U10.5@35.755,37.6 ; 34.7,41.6 U12.5@35.755,41.6 ; 34.7,44.074 34.7,45.026 ; 34.7,49.7 U6.5@35.755,49.7 ; 34.7,53.4 34.75,53.45 U8.5@35.755,53.45 ; 34.7,57.7 U5.5@35.755,57.7
  Top Layer w0.5: R41.2@5.1,11.2 5.1,7.3 6.61,5.79 10.09,5.79 13.61,9.31 IC3.12@15.85,9.31 25.35,18.81 25.35,22.041 32.609,29.3 39.7,29.3 45.4,35 45.4,36.7 44.9,37.2 40.1,37.2 37.9,35 34.793,35 34.5,35.293 34.5,37.6 34.7,37.8 34.7,38.074 34.7,41.6 34.7,44.074 35.349,43.425 43.975,43.425 48.3,39.1 48.3,34.5 39.73,25.93 v4(38.17,25.93) ; v1(10.2,45) 2.193,45 1.9,45.293 1.9,98.5 5.7,102.3 11.3,102.3 R38.2@11.4,102.2 ; IC4.9@29.35,12.58 29.362,12.592 29.362,14.162 33.8,18.6 33.8,24.1 v4(32.125,25.775) ; 34.7,45.026 34.7,45.5 ; 34.7,59.366 34.7,57.7 34.7,53.4 34.7,49.7 34.7,47.6 ; U9.5@35.755,45.5 34.7,45.5 ; v4(54.6,32.3) 51.6,32.3 50.3,33.6 50.3,40 42.7,47.6 34.7,47.6 ; IC2.9@55.17,12.58 55.17,19.564 56.2,20.594 v4(56.2,21) ; 34.7,45.5 34.7,47.6
  Top Layer w1: v4(54.6,32.3) 54.6,34.3 56.7,36.4 56.7,43.6 51,49.3 51,61.6 60.213,70.813 60.213,72.627 U.3@60.04,72.8 73.1,72.8 83.5,62.4 83.5,57.6 83.5,56.9 ; 81.996,57.6 82.029,57.567 82.429,57.567 ; D1.1@87.06,85.4 88.8,87.14 88.8,92.1 96.586,99.886 100.214,99.886 100.8,99.3 100.8,59.1 J3.1@98.1,56.4 96.5,54.8 C8.1@87.3,54.8
  Top Layer w3: L1.2@76.3,59.6 76.3,58.1 76.8,57.6 82.029,57.6 84.5,57.6 C8.1@87.3,54.8
  Bottom Layer w0.5: v1(10.2,45) 16.8,51.6 v1(16.8,56.8)
  Bottom Layer w0.7: R16.2@74.6,54.5 74.75,54.65 87.15,54.65 C8.1@87.3,54.8
  Bottom Layer w1: v4(32.125,25.775) 32.7,25.2 36.37,25.2 v4@37.221,26.051 ; v4(54.6,32.3) 54.6,28.5 56.2,26.9 v4(56.2,21)
+5v_ISO: C1.2 C3.2 C4.2 DD1.8 ISO1.10 ISO1.16 R2.2 R8.1 U1.3 XP1.2 | length 85.3
  Top Layer w0.5: v3@43.045,93.571 43.651,92.965 U1.3@44.85,92.965 ; v3(44.1,84.4) 44.291,84.591 44.291,85.391 45.3,86.4 C3.2@45.4,86.4 ; C4.2@51.5,87.9 51.55,87.85 51.55,86.15 v3(51.6,86.1)
  Top Layer w1: v3(42.425,93.825) 42.425,93.381 41.275,92.231 41.275,87.225 v3(44.1,84.4) 46.4,82.1 52.7,82.1 53.4,82.8 ; v3@42.45,94.423 42.45,98.25 47.8,103.6 v3(47.8,108.2) ; v3(51.6,86.1) 53.4,84.3 53.4,82.8 ; XP1.2@63.9,85.7 63.9,85.65 61.05,82.8 53.4,82.8
  Bottom Layer w0.5: v3(42.425,93.825) 43.074,93.825 43.424,94.175 ISO1.10@45.34,94.175 ; v3(44.1,84.4) 44.1,84.671 44.56,85.131 44.56,86.505 44.61,86.555 ISO1.16@45.34,86.555 ; v3(51.6,86.1) 51.655,86.045 53.95,86.045 DD1.8@54,85.995 53.2,85.995 53.15,85.945 53.15,85.25 51.9,84 R8.1@51.9,83.8
  Bottom Layer w1: R2.2@46.2,106.7 46.2,106.9 47.404,108.104 47.704,108.104 v3(47.8,108.2) ; XP1.2@63.9,85.7 66.7,88.5 C1.2@73.718,88.5
+5v_RJ: J1.4 J2.4 XP1.1 | length 44.3
  Top Layer w1: XP1.1@61.36,85.7 61.397,85.737 61.397,98.173 J1.4@61.435,98.21 61.435,93.665 64.3,90.8 79,90.8 81.385,93.185 J2.4@81.385,98.26
A: D2.1 J1.2 J2.2 R4.2 R6.1 S1.3A | length 61.5
  Top Layer w0.5: D2.1@65.75,93.175 65.75,93.325 63.975,95.1 J1.2@63.975,98.21 65.719,98.21 66.429,97.5 v3(66.7,97.5)
  Bottom Layer w0.5: S1.3A@49.21,106.74 49.055,106.585 48.485,106.585 46.65,104.75 46.45,104.75 46.2,104.5 R4.2@46.2,104.3 46.2,101.5 47.6,100.1 51.2,100.1 54.6,96.7 62.2,96.7 63.71,98.21 J1.2@63.975,98.21 63.975,94.275 63.1,93.4 R6.1@63.1,93.2 ; v3(66.7,97.5) 66.893,97.5 67.493,98.1 71.7,98.1 73.9,95.9 82.7,95.9 83.879,97.079 83.879,98.214 J2.2@83.925,98.26
AGND: C14.2 R40.2 R59.1 R64.1 SW1.2 U4.12 U11.5 U13.5 VD1.3 | length 104.5
  Top Layer w0.254: C14.2@13.3,93.4 14.75,91.95 U4.12@14.75,87.27
  Top Layer w0.4: v6(9.5,94.1) 9.5,94.262 9.3,94.462 R40.2@9.3,95.7 VD1.3@12.107,95.7 ; VD1.3@12.307,95.499 12.307,95.349 12.507,95.149 12.657,95.149 13.3,94.505 C14.2@13.3,93.4 ; R64.1@22.6,62.3 22.575,62.325 22.575,64.065 U13.5@22.55,64.09 22.55,64.4 23.6,65.45 23.6,66.7 23.782,66.7 24.032,66.95 v1(24.14,66.95) ; v1(26.517,67.047) 27.622,67.047 27.969,66.7 31.534,66.7 32.034,67.2 35.6,67.2 ; SW1.2@35.6,65.2 35.6,67.2 ; v1(36.6,67.3) 36.523,67.223 35.623,67.223 35.6,67.2 ; v1(38.45,66.15) 40.455,66.15 41.65,64.955 U11.5@41.65,64.645 41.625,64.62 41.625,62.425 R59.1@41.6,62.4
  Bottom Layer w0.4: v6(9.5,94.1) 5.3,94.1 1.4,90.2 1.4,66.4 7.6,60.2 14,60.2 20.75,66.95 v1(24.14,66.95) 24.19,66.9 26.087,66.9 26.158,66.97 26.44,66.97 v1(26.517,67.047) ; v1(36.6,67.3) 37.673,66.227 38.373,66.227 v1(38.45,66.15)
B: D2.2 J1.1 J2.1 R5.1 S1.1A S1.2A | length 69.7
  Top Layer w0.5: J1.1@65.245,100.75 68.65,100.75 70.9,98.5 70.9,93.468 70.607,93.175 D2.2@67.65,93.175
  Bottom Layer w0.45: 82.66,98.101 82.66,98.763 83.407,99.51 83.905,99.51 J2.1@85.195,100.8
  Bottom Layer w0.5: S1.2A@49.21,104.2 S1.1A@49.21,101.66 53.04,101.66 55.2,99.5 56.868,99.5 56.893,99.475 58.28,99.475 58.29,99.485 59.474,99.485 59.484,99.475 60.795,99.475 60.805,99.485 61.963,99.485 61.973,99.475 63.233,99.475 63.243,99.485 63.98,99.485 J1.1@65.245,100.75 ; R5.1@63.1,90.9 63.1,91.1 65.25,93.25 65.25,98.926 65.245,98.931 J1.1@65.245,100.75 ; 82.66,98.101 82.66,97.732 81.628,96.7 75,96.7 70.95,100.75 J1.1@65.245,100.75
GND: C2.2 C5.2 C7.2 C8.2 C9.2 C10.1 C11.2 C12.1 C13.1 C15.2 C16.2 C17.2 C18.2 C19.2 C20.2 C21.2 C22.2 D1.2 D3.A D4.2 D5.2 D6.2 D7.2 D8.2 D9.2 D10.2 D16.A D17.A D18.A D19.A DD2.3 DD2.5 DD2.6 IC1.4 IC2.8 IC3.2 IC4.8 ISO1.2 ISO1.8 J3.2 J4.1 J5.6 R18.2 R19.2 R25.2 R26.2 R27.2 R28.2 R29.2 R30.2 R31.2 R32.2 R33.2 R34.2 R43.1 R44.1 R45.1 R46.1 R47.1 R48.1 R49.1 R50.1 R51.1 R52.1 SW1.1 U3.11 U4.31 U4.47 U4.63 U5.2 U6.2 U7.11 U8.2 U9.2 U10.2 U12.2 U.1 X1.3 X2.3 | length 199.3
  Top Layer w0.254: v1(9.7,76.3) 9.7,78.254 9.783,78.337 10.817,78.337 U4.31@10.83,78.35 ; U4.47@19.75,75.93 19.763,75.917 19.763,75.1 19.995,74.868 21.268,74.868 v1(21.3,74.9) ; U4.63@22.17,84.85 22.183,84.837 23.137,84.837 24.6,86.3 v1(24.6,86.7)
  Top Layer w0.4: U3.11@5.175,42.03 v1@5.175,43.775 ; U7.11@11.75,54 11.75,55.85 v1(11.8,55.9) ; v2(31.7,57.7) U5.2@33.245,57.7 ; v2(31.8,53) 32.275,53.475 33.22,53.475 U8.2@33.245,53.45 ; v2(31.998,49.702) 31.999,49.701 33.244,49.701 U6.2@33.245,49.7 ; v2(32,41.5) 32.05,41.55 33.195,41.55 U12.2@33.245,41.6 ; v2(32,45.4) 32.05,45.45 33.195,45.45 U9.2@33.245,45.5 ; v2(32.048,37.552) 32.072,37.576 33.221,37.576 U10.2@33.245,37.6
  Top Layer w0.5: v1@5.175,43.775 v1(5.2,43.8)
  Top Layer w1: 52.7,72.7 52.8,72.8 U.1@54.96,72.8 ; D3.A@59.2,63.268 59.2,66.4 59.3,66.5 ; 62.3,46.3 DD2.5@62.3,49.8 ; 65.5,46.6 65.7,46.8 DD2.3@65.7,49.8
  Top Layer w2: IC4.8@30.62,7.5 30.62,4.072 31.792,2.9 56.3,2.9 ; IC2.8@56.44,7.5 56.44,3.04 56.3,2.9 ; J5.6@98.1,39.6 101,39.6 102.7,37.9 102.7,10.4 95.2,2.9 56.3,2.9
  Bottom Layer w0.5: v5@33.2,62 v5@33.2,65.8 ; ISO1.8@36.06,95.445 36.79,95.445 37,95.655 C2.2@37,99.8 ; R18.2@74.6,48.4 79.2,48.4 C7.2@84.5,43.1
  Bottom Layer w3: D16.A@70,40.168 D17.A@76.9,40.168 D18.A@83.8,40.168 D19.A@90.7,40.168 97.532,40.168 J5.6@98.1,39.6
  other v5: 13.7,12.1 36.2,33.2 18.5,33.7 31.9,34.3 5.3,54.3 5.4,59.1 33.1,62.2 33.1,64.1 33.1,66.1 30.1,86.525
  other v8: 3.25,2.95 102.575,2.95 3.25,108.975 102.575,108.975
GND_ISO: C1.1 C3.1 C4.1 D1.4 D2.3 DD1.5 ISO1.9 ISO1.15 J1.3 J1.S1 J1.S2 J2.3 J2.S1 J2.S2 R1.2 R3.1 R7.2 U1.2 | length 199.4
  Top Layer w0.5: v3(42.975,88.3) 44.9,88.3 46.751,90.151 46.751,93.749 46.265,94.235 44.2,94.235 43.4,95.035 43.4,96.907 44.493,98 v3(45.4,98) R3.1@47.7,98 47.7,99.4 48.4,100.1 51.107,100.1 51.868,100.861 51.868,108.373 53.05,109.555 J1.S2@53.05,110.15 ; 43.97,88 C3.1@45.4,88 45.45,87.95 49.85,87.95 C4.1@49.9,87.9 ; R7.2@51,83.8 51,85.003 49.9,86.103 C4.1@49.9,87.9 ; v3(54.6,91.5) 54.5,91.5 52.313,89.313 50.513,89.313 49.98,88.78 49.98,87.98 C4.1@49.9,87.9 ; J1.3@62.705,100.75 64.605,102.65 ; J2.S1@88.475,110.175 J2.S1@88.5,110.2
  Top Layer w1: R1.2@49.6,110.3 49.6,110.225 52.975,110.225 J1.S2@53.05,110.15 ; J1.3@62.705,100.75 62.705,100.85 64.555,102.7 72.2,102.7 ; D2.3@66.7,95.425 68.554,95.425 69.429,96.3 v3(69.7,96.3) ; v3(72.9,94.7) 72.9,102 72.2,102.7 ; J2.3@82.655,100.8 82.531,100.924 82.531,101.969 81.8,102.7 72.2,102.7
  Bottom Layer w0.5: 43.875,87.875 45.29,87.875 ISO1.15@45.34,87.825 ; ISO1.9@45.34,95.445 45.35,95.445 45.4,95.495 v3(45.4,98) ; DD1.5@54,89.805 53.712,89.805 53.662,89.855 53.662,90.562 v3(54.6,91.5) ; J2.S2@73,110.2 73.008,110.208 78.725,110.208 78.758,110.175 82.68,106.253
  Bottom Layer w1: v3(69.7,96.3) 69.871,96.129 71.471,96.129 v3(72.9,94.7) 77.5,94.7 79.44,92.76 79.44,87.76 ; C1.1@76.4,88.5 76.5,88.4 78.8,88.4 79.44,87.76 ; 78.75,110.175 82.676,106.249 ; D1.4@79.44,85.4 79.44,87.76 ; J2.3@82.655,100.8 82.68,100.825 82.68,106.253
  Bottom Layer w2: J1.S2@53.05,110.15 J1.S2@53.075,110.175 ; J1.S1@68.55,110.15 68.517,110.183 53.083,110.183 J1.S2@53.075,110.175 ; 78.725,110.175 78.733,110.183 88.483,110.183 J2.S1@88.5,110.2 ; 78.75,110.175 J2.S2@73,110.175 ; 78.758,110.175 J2.S2@73,110.175 ; J1.S2@53.075,110.175 J2.S2@73,110.175
NetC12_2: C12.2 Q1.2 U4.5 | length 10.8
  Top Layer w0.254: U4.5@18.25,87.27 18.25,90.85 19.7,92.3 20.9,92.3 Q1.2@21,92.2 C12.2@24.8,92.2
NetC13_2: C13.2 Q1.1 U4.6 | length 20.3
  Top Layer w0.254: U4.6@17.75,87.27 17.75,99.55 20,101.8 Q1.1@21,101.8 C13.2@24.8,101.8
NetC14_1: C14.1 R38.1 R39.1 U4.13 VD1.1 | length 24.4
  Top Layer w0.254: 11.7,92.5 14.25,89.95 U4.13@14.25,87.27
  Top Layer w0.4: 11.7,92.5 C14.1@11.7,93.4 ; C14.1@11.7,93.5 C14.1@11.7,93.4 ; R38.1@13.4,102.2 13.3,102.1 13.3,99.9 13.3,97.749 VD1.1@13.257,97.749 12.208,96.7 8.134,96.7 7.9,96.466 7.9,94.2 9,93.1 11.266,93.1 11.366,93.2 11.5,93.2 C14.1@11.7,93.4
NetC15_1: C15.1 C16.1 C17.1 C18.1 C19.1 C20.1 IC3.16 R41.1 | length 29.6
  Top Layer w0.4: v2(3.4,14.4) 3.467,14.333 3.767,14.333 4.9,13.2 R41.1@5.1,13.2 ; v2(13.3,19) 13.395,19 13.865,19.47 IC3.16@15.85,19.47
  Bottom Layer w0.4: C20.1@3.7,26.1 C19.1@3.7,24.04 C18.1@3.7,21.98 C17.1@3.7,19.92 C16.1@3.7,17.86 C15.1@3.7,15.8 3.7,14.795 3.4,14.495 v2(3.4,14.4) 4.6,13.2 7.5,13.2 v2(13.3,19)
NetD1_6: D1.6 XP1.3 | length 9.3
  Bottom Layer w1: XP1.3@66.44,85.7 68.24,83.9 72.698,83.9 74.198,85.4 D1.6@74.36,85.4
NetD3_C: D3.C DD2.2 L1.1 | length 24.4
  Top Layer w1: D3.C@59.2,56.132 59.708,56.132 D3.C@59.708,56.01 ; 62.605,56.01 D3.C@59.708,56.01 ; DD2.2@67.4,49.8 67.4,52.632 66.082,53.95 61.768,53.95 60.605,55.113 60.605,55.235 59.83,56.01 D3.C@59.708,56.01
  Top Layer w3: D3.C@59.708,56.132 62.831,56.132 64.3,57.6 65.8,57.6 66.3,58.1 L1.1@66.3,59.6